# Altium PCB PJ1301-MAINPCB.PcbDoc (part 4 of 4)
Units mm, origin at the board's own origin, x right, y up, seen from the top; angles counter-clockwise.
Board outline 163.83 x 187.81 mm, 4 copper layers (Top Layer, GND, POWER, Bottom Layer); 435 components, 348 nets, 1618 pads, 913 vias.
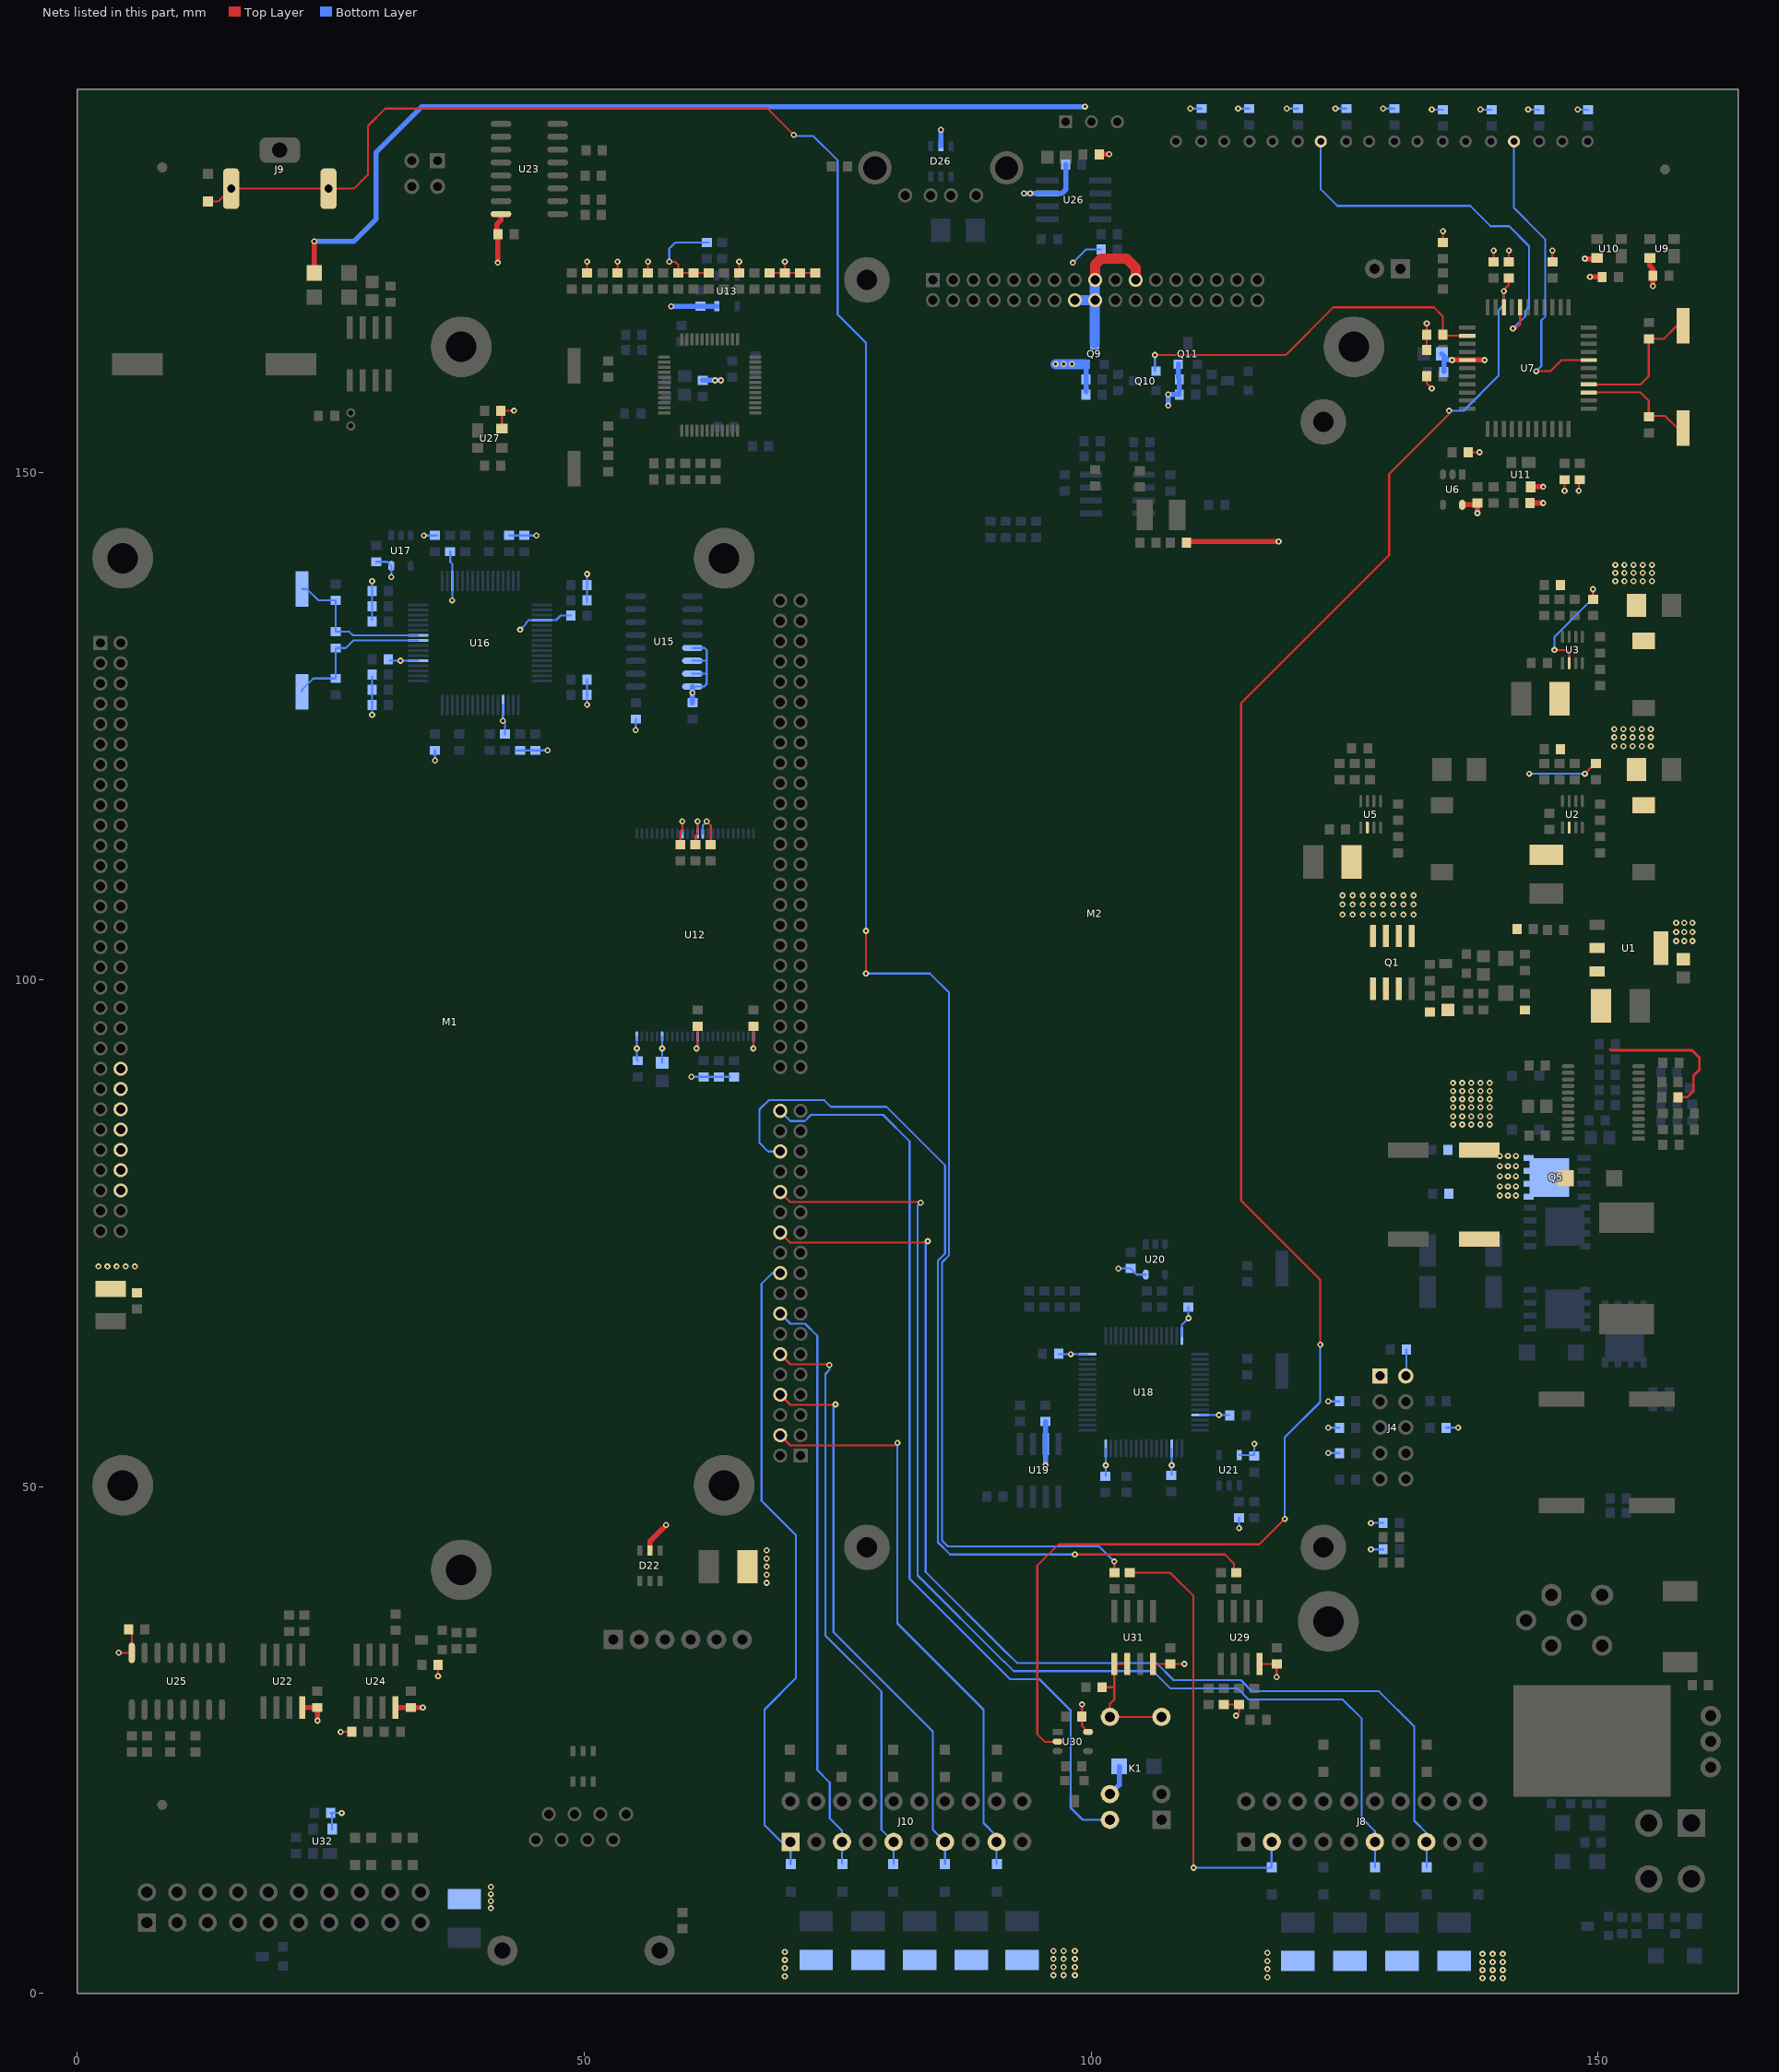
[diagram p6: the nets of this part, all layers, seen from the top]

## Via types
v1: diameter 0.6, hole 0.3, Top Layer to Bottom Layer, tented both sides, 912 vias
v2: diameter 0.6, hole 0.3, Top Layer to Bottom Layer, 1 vias

## Nets (pads, with @x,y where several pads share a name; then routed paths per layer and width w, separated by ;. In a path a pad name is that pad's centre, name@x,y a point inside that pad or via, vN(x,y) a via of type N, cw(c..) or ccw(c..) an arc to the next point about the centre after c; other vN are vias at no path point) (continued)
V3.3: C16.1 C57.2 C58.2 C59.2 C60.2 C61.2 C62.2 C63.2 C78.1 C79.1 C80.2 C81.2 C82.2 C83.2 C84.1 C87.1 C88.1 C89.1 C91.2 C92.2 C93.2 C94.2 C95.2 C96.2 C97.1 C101.1 C107.1 C112.2 C122.1 C123.2 C124.1 C125.1 J4.1 J4.2 L1.2 L5.2 Q9.2 Q11.2 R14.1 R53.2 R54.2 R55.2 R56.1 R63.2 R64.2 R67.1 R69.2 R70.2 R71.2 R72.2 R73.2 R74.2 R75.2 R76.2 R77.2 R78.2 R79.2 R80.2 R81.2 R82.2 R83.2 R84.2 R85.2 R86.2 R91.2 R92.2 R93.2 R95.2 R98.2 R101.1 R102.1 R110.2 R111.2 R112.2 R113.2 R119.1 R129.2 R130.2 R152.2 R153.2 R154.2 R155.2 R158.2 U12.1 U12.12 U12.19 U12.24 U12.34 U12.37 U12.38 U13.5 U15.13 U15.14 U15.15 U15.16 U16.4 U16.21 U16.35 U16.52 U17.5 U18.13 U18.19 U18.32 U18.48 U18.64 U20.5 U21.5 U23.16 U25.16 U27.4 U29.4 U30.5 U31.4 U32.4 | length 174.9
  Top Layer w0.2: v1(4.1,33.6) 4.112,33.588 U25.16@5.4,33.588 5.4,35.6 C107.1@5.1,35.9 ; U27.4@41.9,154.35 C112.2@41.9,156 ; C112.2@41.9,156.1 v1(43.1,156.1) ; R152.2@50.3,169.7 v1(50.3,170.8) ; R153.2@53.3,169.7 v1(53.3,170.8) ; R154.2@56.3,169.7 v1(56.3,170.8) ; v1@58.388,170.788 59.012,170.788 59.3,170.5 R155.2@59.3,169.7 R72.2@62.3,169.7 ; C58.2@59.5,113.3 59.5,114.6 59.7,114.8 v1(59.7,115.6) ; C59.2@61,113.3 61,114.2 61.2,114.4 v1(61.2,115.6) ; v1(61.1,93.2) 61.2,93.3 C62.2@61.2,95.4 ; v1(62.1,115.6) 62.5,115.2 C60.2@62.5,113.3 ; R71.2@65.3,169.7 v1(65.3,170.8) ; v1(66.7,93.2) C63.2@66.7,95.4 ; R70.2@68.3,169.7 R64.2@69.8,169.7 ; v1(69.8,170.8) R64.2@69.8,169.7 ; R63.2@72.8,169.7 R69.2@71.3,169.7 R64.2@69.8,169.7 ; v1(99.1,28.5) C123.2@99.1,27.3 99.1,26.4 U30.5@99.7,25.8 ; U31.4@106.105,32.5 v1(109.2,32.5) ; R130.2@113.1,28.5 R129.2@114.5,28.5 ; v1(114.3,27.4) 114.6,27.7 R129.2@114.6,28.5 ; U29.4@116.605,32.5 C122.1@118.3,32.5 v1(118.3,31.2)
  Top Layer w0.5: v1(41.5,170.7) C101.1@41.5,173.5 41.4,173.6 41.4,174.5 41.812,174.912 U23.16@41.812,175.5
  Bottom Layer w0.2: U32.4@25.15,16.2 25.15,17.65 C125.1@25,17.8 v1(26.1,17.8) ; v1(29.1,126.1) R80.2@29.1,128.6 R81.2@29.1,129.9 ; R85.2@29.1,135.5 R84.2@29.1,136.8 v1(29.1,139.3) ; C84.1@29.5,141.2 30.6,141.2 U17.5@31,140.8 v1(31,139.7) ; C80.2@30.85,131.45 U16.21@33.65,131.45 ; v1@34.4,143.8 R82.2@35.5,143.8 ; v1(35.3,121.6) R78.2@35.3,122.6 ; C83.2@36.8,142.2 36.8,141.2 37,141 U16.35@37,139.3 v1(37,137.4) ; U16.4@42,127.1 v1(42,125.5) 42.2,125.3 C81.2@42.2,124.2 ; R86.2@42.6,143.8 v1(45.3,143.8) ; R74.2@43.233,122.6 45.8,122.6 v1(46.4,122.6) ; v1(43.7,134.5) 44.3,135.1 44.3,135.2 44.55,135.45 U16.52@45.85,135.45 47.25,135.45 47.7,135.9 C82.2@48.7,135.9 ; v1(50.3,127.1) R77.2@50.3,129.6 ; R93.2@50.3,137.2 50.3,138.5 v1@50.3,139.8 ; v1(55.1,124.6) R73.2@55.1,125.7 ; U12.24@55.2,94.4 v1(55.2,93.2) 55.2,92.1 C61.2@55.3,92 ; C57.2@57.7,91.8 U12.19@57.7,94.4 ; v1(58.4,170.8) 58.4,172.1 59,172.7 R67.1@62.3,172.7 ; U12.34@59.7,114.4 v1(59.7,115.6) ; v1(60.6,90.4) R53.2@61.8,90.4 R55.2@64.4,90.4 ; U15.16@60.688,128.9 61.84,128.9 62.07,129.13 ; U15.15@60.688,130.17 62.07,130.17 62.1,130.2 ; U15.14@60.688,131.44 62.06,131.44 ; U15.13@60.688,132.71 60.698,132.7 61.9,132.7 62.1,132.5 62.1,130.2 ; v1(61.1,93.2) 61.2,93.3 U12.12@61.2,94.4 ; U12.37@61.2,114.4 v1(61.2,115.6) ; U12.38@61.7,114.4 61.7,115.2 v1(62.1,115.6) ; 62.1,129.16 62.1,130.2 ; v1(66.7,93.2) U12.1@66.7,94.4 ; C95.2@96.85,63.05 U18.48@99.65,63.05 ; v1(98.2,170.7) 99.5,172 R158.2@101,172 ; C94.2@101.45,51.05 U18.32@101.45,53.75 ; v1(102.7,71.5) C89.1@103.9,71.5 104.5,70.9 U20.5@105.4,70.9 ; C93.2@107.95,51.15 U18.19@107.95,53.75 ; U18.64@108.95,64.85 108.95,65.95 v1(109.6,66.6) C96.2@109.6,67.7 ; U18.13@110.75,57.05 C92.2@113.65,57.05 ; v1(114.6,45.9) R119.1@114.6,46.9 ; U21.5@114.6,53.1 116,53.1 116.1,53.2 v1(116.1,54.2) ; v1(123.4,53.3) R112.2@124.5,53.3 ; v1(123.4,55.8) R111.2@124.5,55.8 ; v1(123.4,58.4) R110.2@124.5,58.4 ; v1(127.6,43.8) R102.1@128.8,43.8 ; v1(127.6,46.4) R101.1@128.8,46.4 ; J4.2@131.1,60.96 C91.2@131.1,63.5 ; R113.2@135,55.8 v1(136.2,55.8)
  Bottom Layer w0.5: v1(58.6,166.4) C78.1@61.5,166.4 U13.5@63.1,166.4 ; U15.16@60.688,128.9 60.7,128.888 v1(60.7,128.3) C79.1@60.7,127.3 ; L5.2@61.7,159.1 v1(63.5,159.1) ; Q9.2@99.4,160.7 99.5,160.6 C87.1@99.5,158 ; v1(107.6,156.6) v1(107.6,157.7) C88.1@108.7,157.7 ; Q11.2@108.595,160.7 108.595,159.405 108.7,159.3 R98.2@108.7,159.2 C88.1@108.7,158
  Bottom Layer w1: v1(96.5,160.7) Q9.2@99.4,160.7
  other v1: 101.45,52.1 107.95,52.1 112.6,57.05 98,63.05 57.7,93.2 151.6,123 152.5,123 153.4,123 154.3,123 155.2,123 151.6,123.9 152.5,123.9 153.4,123.9 154.3,123.9 155.2,123.9 151.6,124.7 152.5,124.7 153.4,124.7 154.3,124.7 155.2,124.7 31.9,131.45 50.3,140 34.2,143.8 62.9,159.1 97.3,160.7 98.1,160.7
V3.3-MCU: C10.2 C44.1 C47.2 C48.2 C49.2 C50.2 C51.2 D27.2 R4.1 R39.1 R40.1 R41.1 R42.1 R43.1 R44.1 R45.1 R46.1 R47.1 R48.1 R49.1 R50.1 R51.1 R52.1 R97.2 R100.2 R106.1 R134.1 R139.1 U1.2 U1.4 U6.5 U7.38 U9.4 U10.4 U11.4 | length 127.2
  Top Layer w0.2: R139.1@133.1,159.5 133.1,158.8 v1(133.6,158.3) ; R100.2@133.1,162.2 R97.2@133.1,163.6 v1(133.1,164.7) ; R51.1@134.7,172.7 v1(134.7,173.8) ; R39.1@137.2,152 v1(138.3,152) ; R106.1@139.7,170.8 v1(139.7,171.9) ; R134.1@141.2,170.8 v1(141.2,171.9) ; R49.1@145.5,170.8 v1(145.5,171.9) ; v1(146.7,148.2) R50.1@146.7,149.3 ; v1(148.1,148.2) R4.1@148.1,149.3
  Top Layer w0.5: D27.2@23.4,169.5 v1(23.4,172.8) ; R52.1@100.7,181.4 v1(101.8,181.4) ; v1(135.6,161.1) U7.38@137.1,161.1 v1(138.8,161.1) ; v1(148.7,171.1) U10.4@149.85,171.1 ; v1(149.2,169.3) C50.2@150.4,169.3 ; U9.4@155.1,171.15 155.1,170.4 155.4,170.1 C48.2@155.4,169.4 v1(155.4,168.4)
  Top Layer w0.508: U6.5@136.6,146.827 C44.1@137.927,146.827 ; v1(138.1,146) C44.1@138.1,147 ; C51.2@143.3,147 v1(144.6,147) ; U11.4@143.35,148.6 v1(144.6,148.6)
  Bottom Layer w0.2: v1(109.8,185.9) R45.1@110.9,185.9 ; v1(114.5,185.9) R44.1@115.6,185.9 ; v1(119.3,185.9) R47.1@120.4,185.9 ; v1(124.1,185.9) R48.1@125.2,185.9 ; v1(128.8,185.9) R43.1@129.9,185.9 ; v1(133.6,185.8) R42.1@134.7,185.8 ; v1(138.4,185.8) R41.1@139.5,185.8 ; v1(143.1,185.8) R40.1@144.2,185.8 ; v1(148,185.8) R46.1@149,185.8
  Bottom Layer w0.5: v1(23.4,172.8) 27.3,172.8 29.5,175 29.5,181.6 34,186.1 v1(99.4,186.1) ; C49.2@134.6,161.7 C49.2@134.8,161.5 ; C47.2@134.8,160 C49.2@134.8,161.5 ; v1(135.6,161.1) 135.2,161.1 C49.2@134.8,161.5
  other v1: 157.7,103.8 158.5,103.8 159.3,103.8 157.7,104.7 158.5,104.7 159.3,104.7 157.7,105.6 158.5,105.6 159.3,105.6
V5: C26.1 C55.2 C56.2 C90.2 C100.2 C106.1 C113.1 D22.5 D26.5 D40.1 F2.2 K1.9 L2.2 M1.A44 M1.A46 M1.A48 M1.A50 M1.A52 M1.A54 M1.A56 R20.1 R123.1 R126.2 R140.2 U19.3 U22.8 U24.8 U26.7 | length 35.9
  Top Layer w0.2: v1(26,25.8) R126.2@27.1,25.8 ; v1(35.6,31.3) R123.1@35.6,32.4
  Top Layer w0.5: U22.8@22.205,28.2 C100.2@23.7,28.2 v1(23.7,26.9) ; U24.8@31.405,28.2 v1(34.1,28.2) ; D22.5@56.5,43.7 56.5,44.6 57.5,45.6 v1(58.1,46.2) ; R140.2@109.3,143.2 v1(118.5,143.2)
  Bottom Layer w0.5: D26.5@85.2,182.2 v1(85.2,183.8) ; v1(93.365,177.535) U26.7@95.7,177.535 97.135,177.535 97.5,177.9 C113.1@97.5,180.4 ; v1(95.5,52.1) C90.2@95.5,56.4 ; K1.9@101.86,19.66 102.771,20.571 D40.1@102.771,22.4
  other v1: 68,40.5 68,41.3 68,42.1 68,42.9 68,43.7 2.1,71.7 3,71.7 3.9,71.7 4.8,71.7 5.7,71.7 151.7,139.3 152.6,139.3 153.5,139.3 154.4,139.3 155.3,139.3 151.7,140.1 152.6,140.1 153.5,140.1 154.4,140.1 155.3,140.1 151.7,140.9 152.6,140.9 153.5,140.9 154.4,140.9 155.3,140.9 94,177.535
V12: C15.2 C25.2 C37.2 F3.1 F4.1 F5.1 F6.1 F7.1 F9.1 F10.1 F11.1 F12.1 F13.1 Q1.5 Q1.6 Q1.7 Q1.8 R2.2 R12.2 R18.2 U2.2 U3.2 U5.2 | length 18.1
  Top Layer w0.2: v1(145.7,132.5) 146.9,132.5 147.15,132.25 U3.2@147.15,131.2 ; v1@148.6,120.3 v1(148.7,120.3) R12.2@149.7,121.3 ; R18.2@149.5,137.5 v1(149.5,138.5)
  Bottom Layer w0.2: v2(143.2,120.3) v1@148.6,120.3 ; v1(145.7,132.5) 145.7,133.8 149.5,137.6 v1(149.5,138.5)
  other v1: 138.6,1.5 139.6,1.5 140.6,1.5 117.4,1.6 69.8,1.7 96.3,1.8 97.3,1.8 98.4,1.8 138.6,2.3 139.6,2.3 140.6,2.3 117.4,2.4 69.8,2.5 96.3,2.6 97.3,2.6 98.4,2.6 138.6,3.1 139.6,3.1 140.6,3.1 117.4,3.2 69.8,3.3 96.3,3.4 97.3,3.4 98.4,3.4 138.6,3.9 139.6,3.9 140.6,3.9 117.4,4 69.8,4.1 96.3,4.2 97.3,4.2 98.4,4.2 40.8,8.4 40.8,9.1 40.8,9.8 40.8,10.5 124.8,106.4 125.8,106.4 126.8,106.4 127.8,106.4 128.8,106.4 129.8,106.4 130.8,106.4 131.8,106.4 124.8,107.4 125.8,107.4 126.8,107.4 127.8,107.4 128.8,107.4 129.8,107.4 130.8,107.4 131.8,107.4 124.8,108.3 125.8,108.3 126.8,108.3 127.8,108.3 128.8,108.3 129.8,108.3 130.8,108.3 131.8,108.3
V12-MP: C2.2 C9.2 C19.1 C20.1 C22.2 C23.2 D9.2 Q1.1 Q1.2 Q1.3 Q5. Q5.5 Q5.6 Q5.7 Q5.8 R1.2 R26.1 R156.1 U1.3 | length 14.4
  Top Layer w0.254: 151.2,93.1 151.273,93.027 159.273,93.027 160,92.3 160,91.1 159.4,90.5 159.4,89 158.8,88.4 R26.1@157.9,88.4
  other v1: 140.3,78.7 141.1,78.7 141.9,78.7 140.3,79.6 141.1,79.6 141.9,79.6 140.3,80.6 141.1,80.6 141.9,80.6 140.3,81.6 141.1,81.6 141.9,81.6 140.3,82.6 141.1,82.6 141.9,82.6 135.7,85.7 136.6,85.7 137.5,85.7 138.4,85.7 139.3,85.7 135.7,86.5 136.6,86.5 137.5,86.5 138.4,86.5 139.3,86.5 135.7,87.4 136.6,87.4 137.5,87.4 138.4,87.4 139.3,87.4 135.7,88.2 136.6,88.2 137.5,88.2 138.4,88.2 139.3,88.2 135.7,89 136.6,89 137.5,89 138.4,89 139.3,89 135.7,89.8 136.6,89.8 137.5,89.8 138.4,89.8 139.3,89.8
VIDEO-OUT: K1.5 K1.6 R138.1 U31.1 U31.2 | length 12.9
  Top Layer w0.2: R138.1@101.1,30.2 102.295,30.2 ; U31.2@103.565,32.5 U31.1@102.295,32.5 102.295,30.2 ; K1.5@106.94,27.28 K1.6@101.86,27.28 101.86,28.56 102.295,28.995 102.295,30.2
VIDEO-SW: R134.2 U7.31 U30.2 | length 185.7
  Top Layer w0.2: U30.2@96.7,24.85 96.65,24.8 95.475,24.8 94.7,25.575 94.7,42.2 96.8,44.3 116.6,44.3 v1(119.1,46.8) ; v1(122.6,64) 122.6,70.4 114.8,78.2 114.8,127.269 129.4,141.869 129.4,149.869 135.3,155.769 v1(135.3,156.1) ; U7.31@140.7,166.3 140.7,168 141.2,168.5 R134.2@141.2,169.2
  Bottom Layer w0.2: v1(119.1,46.8) 119.1,54.834 122.6,58.334 v1(122.6,64) ; v1(135.3,156.1) 136.731,156.1 140.2,159.569 140.2,166 140.7,166.5 v1(140.7,167.9)
VIN1: M1.C32 R132.2 | length 95.5
  Top Layer w0.2: v1(98.4,43.3) 113.2,43.3 114.1,42.4 R132.2@114.1,41.5
  Bottom Layer w0.2: M1.C32@69.352,83.049 68.151,83.049 67.3,83.9 67.3,87.2 68.2,88.1 73.683,88.1 74.334,87.449 79.817,87.449 85.6,81.666 85.6,72.969 84.9,72.269 84.9,44.5 86.1,43.3 v1(98.4,43.3)
VIN2: D37.2 J8.11 M1.C28 | length 116
  Top Layer w0.2: M1.C28@69.352,79.049 70.352,78.049 83.151,78.049 v1(83.2,78)
  Bottom Layer w0.2: v1(83.2,78) 82.9,77.7 82.9,41.234 91.434,32.7 91.466,32.7 92.366,31.8 106.103,31.8 107.803,30.1 114.437,30.1 115.537,29 124.8,29 126.7,27.1 126.7,17.3 127.987,16.013 J8.11@127.987,14.951 ; D37.2@128,12.45 J8.11@128,14.939
VIN3: D38.2 J8.15 M1.C24 | length 116.6
  Top Layer w0.2: M1.C24@69.352,75.049 70.352,74.049 83.749,74.049 v1(83.9,74.2)
  Bottom Layer w0.2: v1(83.9,74.2) 83.7,74 83.7,41.569 91.769,33.5 91.797,33.5 92.697,32.6 106.434,32.6 108.134,30.9 114.769,30.9 115.869,29.8 128.4,29.8 131.867,26.333 131.867,17.033 133.067,15.833 J8.15@133.067,14.951 ; D38.2@133.1,12.45 J8.15@133.1,14.919
VIN4: D39.2 J10.1 M1.C20 | length 63.8
  Bottom Layer w0.2: M1.C20@69.352,71.049 68.549,71.049 67.5,70 67.5,48.6 70.9,45.2 70.9,31.1 67.8,28 67.8,16.6 69.449,14.951 J10.1@70.361,14.951 D39.2@70.361,12.789
VIN5: D46.2 J10.5 M1.C16 | length 57.6
  Bottom Layer w0.2: M1.C16@69.352,67.049 70.352,66.049 71.8,66.049 73,64.849 73,22.041 74.241,20.8 74.241,17.259 75.441,16.059 J10.5@75.441,14.951 D46.2@75.441,12.809
VIN6: D47.2 J10.9 M1.C12 | length 57.5
  Top Layer w0.2: M1.C12@69.352,63.049 70.352,62.049 74.151,62.049 v1(74.2,62)
  Bottom Layer w0.2: v1(74.2,62) 74.2,61.5 73.8,61.1 73.8,35.3 79.321,29.779 79.321,16.151 J10.9@80.521,14.951 D47.2@80.521,12.771
VIN7: D48.2 J10.13 M1.C8 | length 55.9
  Top Layer w0.2: M1.C8@69.352,59.049 70.352,58.049 74.749,58.049 v1(74.8,58.1)
  Bottom Layer w0.2: v1(74.8,58.1) 74.6,57.9 74.6,35.631 84.4,25.831 84.4,16.152 J10.13@85.601,14.951 D48.2@85.601,12.751
VIN8: D49.2 J10.17 M1.C4 | length 57.6
  Top Layer w0.2: M1.C4@69.352,55.049 70.352,54.049 80.649,54.049 v1(80.9,54.3)
  Bottom Layer w0.2: v1(80.9,54.3) 80.9,36.5 89.4,28 89.4,16.8 90.681,15.519 J10.17@90.681,14.951 D49.2@90.681,12.769
VLOSS-LED: D21.2 U7.29 | length 39
  Top Layer w0.2: v1(141.6,164.2) 141.9,164.2 142.3,164.6 U7.29@142.3,166.3
  Bottom Layer w0.2: D21.2@122.653,182.661 122.653,177.947 124.3,176.3 137.403,176.3 139.403,174.3 141.237,174.3 143.2,172.337 143.2,166.331 142.8,165.931 142.8,165.4 v1(141.6,164.2)
VO1: D35.2 J8.3 R137.2 | length 44.4
  Top Layer w0.2: R137.2@103.6,41.5 107.8,41.5 110.1,39.2 v1(110.1,12.4)
  Bottom Layer w0.2: v1(110.1,12.4) 117.75,12.4 D35.2@117.8,12.45 J8.3@117.8,14.924
VO2: D45.2 J9.1 R136.2 | length 234.4
  Top Layer w0.2: D45.2@12.9,176.75 13.95,176.75 J9.1@15.2,178 J9.1@24.8,178 27.3,178 28.7,179.4 28.7,184.2 30.4,185.9 68.1,185.9 v1(70.7,183.3) ; v1(77.8,100.6) v1(77.8,104.8) ; R136.2@102.3,41.5 v1(102.3,42.6)
  Bottom Layer w0.2: v1(70.7,183.3) 70.8,183.2 72.6,183.2 75,180.8 75,165.6 77.8,162.8 v1(77.8,104.8) ; v1(77.8,100.6) 84.1,100.6 86,98.7 86,72.803 85.3,72.103 85.3,44.666 85.866,44.1 100.8,44.1 v1(102.3,42.6)
VOUT: K1.10 M1.C36 | length 92.9
  Bottom Layer w0.2: M1.C36@69.352,87.049 70.352,86.049 71.766,86.049 72.352,86.635 72.352,86.649 79.485,86.649 82.1,84.034 82.1,40.903 92.003,31 94.9,31 98,27.9 98,18.3 99.18,17.12 K1.10@101.86,17.12
WIFI-LED: D13.2 U7.18 | length 30
  Top Layer w0.2: v1(143.9,160) 145.3,160 146.4,161.1 U7.18@149.1,161.1
  Bottom Layer w0.2: D13.2@141.704,182.661 141.704,176.097 144.5,173.3 144.8,173 144.8,165.4 144.4,165 144.4,160.5 v1(143.9,160)
WIFI-PWR: M2.16 M2.17 M2.18 M2.21 Q9.3 | length 15.5
  Top Layer w1: M2.17@100.4,169 100.4,170.5 101,171.1 103.5,171.1 104.4,170.2 M2.21@104.4,169
  Bottom Layer w1: M2.16@98.4,167 M2.18@100.34,167 ; Q9.3@100.34,162.732 M2.18@100.34,167 ; M2.17@100.34,168.94 M2.18@100.34,167 ; M2.18@100.4,167 M2.18@100.34,167
WIFI-PWR-CTRL: Q10.2 R97.1 U7.35 | length 36.6
  Top Layer w0.2: v1(106.3,161.6) 119.2,161.6 123.9,166.3 133.8,166.3 134.7,165.4 R97.1@134.7,163.4 ; R97.1@134.8,163.5 U7.35@137.1,163.5
  Bottom Layer w0.2: Q10.2@106.3,160 v1(106.3,161.6)
X1: C52.2 U7.15 Y1.2 | length 13.9
  Top Layer w0.2: U7.15@149.1,158.7 154.2,158.7 155,159.5 C52.2@155,163.2 156.5,163.2 157.8,164.5 Y1.2@158.4,164.5
X2: C54.2 U7.14 Y1.1 | length 11.8
  Top Layer w0.2: U7.14@149.1,157.9 154.2,157.9 155,157.1 C54.2@155,155.5 155.1,155.6 156.6,155.6 157.821,154.379 Y1.1@158.4,154.379
XT1: C85.2 R94.2 U16.25 Y3.2 | length 15.4
  Bottom Layer w0.2: Y3.2@22.2,128.4 22.2,128.6 23.3,129.7 C85.2@25.5,129.7 R94.2@25.5,132.7 26.5,132.7 27.25,133.45 U16.25@33.65,133.45
XT2: C86.2 R94.1 U16.26 Y3.1 | length 15.2
  Bottom Layer w0.2: Y3.1@22.2,138.521 22.679,138.521 23.8,137.4 C86.2@25.5,137.4 R94.1@25.5,134.3 26.85,134.3 27.2,133.95 U16.26@33.65,133.95
pads on no net: D22.4 D22.6 D26.4 D26.6 D29.2 D29.5 J4.8 J7.4 J7.5 J7.7 J7.8 M1.A3 M1.A4 M1.A5 M1.A6 M1.A7 M1.A8 M1.A9 M1.A10 M1.A19 M1.A22 M1.A25 M1.A27 M1.A28 M1.A29 M1.A30 M1.A40 M1.A42 M1.B4 M1.B5 M1.B6 M1.B7 M1.B8 M1.B9 M1.B10 M1.B11 M1.B12 M1.B18 M1.B23 M2.24 TP17. TP18. TP19. TP20. TP21. TP22. U4.1 U6.1 U7.1 U7.2 U7.3 U7.5 U7.6 U7.7 U7.17 U7.28 U7.39 U7.41 U7.43 U7.44 U12.3 U12.4 U12.5 U12.6 U12.10 U12.11 U12.14 U12.15 U12.20 U12.21 U12.22 U12.26 U12.27 U12.28 U12.33 U12.35 U12.39 U12.40 U12.45 U12.46 U12.47 U14.25 U14.26 U15.9 U15.10 U15.11 U15.12 U16.3 U16.5 U16.13 U16.15 U16.34 U16.36 U16.44 U16.46 U17.1 U18.1 U18.2 U18.3 U18.4 U18.8 U18.9 U18.10 U18.11 U18.14 U18.15 U18.20 U18.21 U18.24 U18.25 U18.26 U18.27 U18.29 U18.30 U18.33 U18.34 U18.35 U18.36 U18.37 U18.38 U18.39 U18.40 U18.41 U18.51 U18.52 U18.53 U18.54 U18.57 U18.58 U18.59 U18.61 U18.62 U19.5 U20.1 U23.7 U23.8 U23.9 U23.10 U26.2 U26.3 U26.8 U28.3 U28.7 U29.3 U29.6 U30.1 U31.3 U31.6

## Polygon pours and split planes (outlines as drawn)
GND on Bottom Layer "Top Layer-No Net" (solid, remove dead copper, pour order 56): 163.83,0 163.83,187.808 0,187.808 0,0
V12-MP on Bottom Layer "Bottom Layer-GND" (solid, pour order 71): 134.8,83.2 134.8,90.308 134.9,90.4 139.9,90.4 140,90.308 140,83.385 140.1,83.292 140.1,83.2
V12-MP on Bottom Layer "Bottom Layer-GND" (solid, pour order 69): 147.3,78.3 147.3,80.7 147.3,83.3 146.3,83.3 137.7,83.3 134.9,83.3 134.8,83.2 134.8,82.2 134.8,78.3 134.9,78.3
NetD11_1 on Bottom Layer "Bottom Layer-GND" (solid, pour order 68): 144,65 144,76.8 143.27,76.8 138.413,76.8 138.3,76.7 138.3,65.1 138.413,65
NetC27_1 on Bottom Layer "Bottom Layer-GND" (solid, pour order 61): 145.4,77.9 144.7,77.9 144.6,77.8 144.6,76.7 144.6,72.2 156,72.2 156,73.1 156,81.9 156,82.7 155.9,82.8 147.9,82.8 147.9,81.1 147.9,79.4 151,79.4 151.1,79.3 151.1,78.4 151.1,78 151,77.9
NetC40_1 on Bottom Layer "Bottom Layer-GND" (solid, pour order 58): 153.7,71.6 154.8,71.6 155.9,71.6 156,71.6 156,70.3 156,69 155.9,68.9 153.5,68.9
NetC40_1 on Bottom Layer "Bottom Layer-GND" (solid, pour order 55): 149.8,61.6 149.6,61.4 148.5,61.4 144.7,61.4 144.6,61.4 144.6,63 144.6,70.5 144.6,71.6 144.7,71.6 147.3,71.6 153.7,71.6 153.8,71.6 153.8,66.85 152.05,66.85 150.05,66.85 149.8,66.85 149.8,63.8
PWR-IN on Bottom Layer "Bottom Layer-GND" (solid, pour order 53): 150.2,66.3 151.8,66.3 155.8,66.3 155.9,66.2 155.9,63.7 155.9,61.7 155.9,49.7 155.8,49.6 151.9,49.6 151.9,46.6 151.8,46.5 148.4,46.5 142.5,46.5 142.4,46.6 142.4,52.5 142.4,61 142.5,61 149.1,61 149.9,61 150.2,61.3
NetD54_2 on Bottom Layer "Bottom Layer-GND" (solid, remove dead copper, pour order 43): 153.002,13.5 156.882,13.5 157.188,13.5 157.291,13.6 157.291,15 157.291,18.3 157.393,18.4 158.107,18.4 162.498,18.4 162.6,18.5 162.6,29.3 162.6,29.4 162.498,29.5 153.002,29.5 152.9,29.4 152.9,27.8 152.9,13.6 153.002,13.5
NetC114_1 on Bottom Layer "Bottom Layer-GND" (solid, pour order 65): 87.7,178.5 90.4,178.5 90.5,178.4 90.5,176.7 90.5,176.6 91.6,175.5 94.2,175.5 97,175.5 97.1,175.4 97.1,174.6 97,174.5 96,174.5 95.9,174.4 95.8,174.3 95.8,174 95.8,172 95.7,171.9 92.8,171.9 87.9,171.9 87.2,171.9 87.1,172 87.1,174 87.1,175.5 87.1,175.7 87.6,176.2 87.6,178.4
V12 on Bottom Layer "Bottom Layer-GND" (solid, pour order 57): 36.1,10.8 36.3,11 40,11 40.7,11 41.3,11 41.5,10.8 41.5,8 41.3,7.8 37.2,7.8 36.8,7.8 36.3,7.8 36.1,8
V12 on Bottom Layer "Bottom Layer-GND" (solid, pour order 64): 71.134,1.2 76.682,1.2 99.087,1.2 99.3,1.367 99.3,4.533 99.087,4.7 69.213,4.7 69,4.533 69,3.617 69,1.367 69.213,1.2
V12 on Bottom Layer "Bottom Layer-GND" (solid, pour order 63): 118.346,1.1 122.887,1.1 141.225,1.1 141.4,1.262 141.4,4.338 141.225,4.5 116.775,4.5 116.6,4.338 116.6,3.448 116.6,1.262 116.775,1.1
AGND on Bottom Layer "Bottom Layer-GND" (solid, remove dead copper, pour order 84): 89.2,154 88.9,153.7 88.9,141.7 89.2,141.4 111.9,141.4 112.2,141.7 112.2,153.7 111.9,154 89.2,154
GND on Top Layer "Top Layer-No Net" (solid, remove dead copper, pour order 54): 163.83,0 163.83,187.808 0,187.808 0,0
GND on Top Layer "Top Layer-No Net" (solid, remove dead copper, pour order 51): 144,109.5 146.7,109.5 147.2,109 147.7,108.5 148.1,108.5 150.7,108.5 150.9,108.3 150.9,104.7 150.7,104.5 148.4,104.5 147.9,104 147,103.1 146.2,103.1 145.9,103.4 145.9,104.7 145.9,105.4 145.9,105.6 145.9,105.8 145.8,105.9 144.2,105.9 143.5,105.9 143.2,106.2 143.2,109.5
GND on Top Layer "Top Layer-No Net" (solid, remove dead copper, pour order 48): 149.9,33 152.9,33 154,33 154.3,33.3 154.4,33.4 154.4,34.4 154.4,36.1 155.2,36.9 155.4,37.1 155.4,38.3 155.4,43.6 155.9,44.1 160.9,44.1 162.9,44.1 163.3,44.5 163.3,46 163.3,60.5 162.9,60.9 152.4,60.9 151.6,60.1 151.6,40.9 151.1,40.4 150.1,40.4 149.9,40.4 148.9,39.4 146.7,37.2 146.7,37.1 146.7,36.4 147.3,35.8 148,35.1 148,34.7 148,33.5 148.5,33
V12-MP on Top Layer "Bottom Layer-GND" (solid, remove dead copper, pour order 52): 127,101.3 130.7,101.3 130.9,101.1 130.9,97.7 130.9,97.5 131.1,97.3 136,97.3 136.3,97 136.3,95.6 136.6,95.3 139.5,95.3 139.8,95.6 139.8,97 140.1,97.3 143.7,97.3 144,97.6 144,101.5 144.3,101.8 151.7,101.8 152.1,101.4 152.1,100.1 152.1,93.2 151.8,92.9 147.2,92.9 141.4,92.9 141.1,92.6 141.1,90.2 126.8,90.2 126.5,90.5 126.5,101 126.8,101.3
V12-MP on Top Layer "Bottom Layer-GND" (solid, remove dead copper, pour order 44): 147.6,81.2 147.6,83.2 147.5,83.3 146.7,83.3 141.2,83.3 141.1,83.4 141.1,90.2 141,90.3 134.9,90.3 134.8,90.2 134.8,78.8 134.8,71.7 135,71.5 141.2,71.5 141.4,71.7 141.4,77.9 141.6,78.1 147.5,78.1 147.6,78.2
NetC1_1 on Top Layer "Bottom Layer-GND" (solid, pour order 76): 156.4,38.4 160,38.4 160.2,38.6 160.2,40.4 160.2,43.3 160,43.5 156.2,43.5 156,43.3 156,40 156,38.6 156.2,38.4
V12 on Top Layer "Bottom Layer-GND" (solid, pour order 75): 137.6,114 137.6,116.5 137.7,116.6 139,116.6 140.3,116.6 140.4,116.7 140.4,117.3 140.4,118.2 140.4,125 140.4,125.4 140.5,125.5 142.9,125.5 144.2,125.5 144.3,125.6 144.3,130 144.4,130.1 146.8,130.1 146.9,130.2 146.9,131.9 147,132 147.3,132 147.4,131.9 147.4,130.2 147.4,123.9 147.2,123.7 146.5,123.7 144.2,123.7 143.9,123.4 143.9,118.5 143.9,113.9 142.5,113.9 137.7,113.9
NetC14_1 on Top Layer "Bottom Layer-GND" (solid, pour order 74): 147.7,115.8 147.9,115.8 148,115.8 148.1,115.7 148.1,114.5 148.1,114.1 148.9,113.3 157,113.3 157.2,113.3 157.3,113.2 157.3,109.1 157.2,109 147.7,109 147.6,109.1 147.6,115.7 147.7,115.8
V12 on Top Layer "Bottom Layer-GND" (solid, pour order 73): 127.1,115.8 127.4,115.8 127.5,115.7 127.5,113.7 127.5,112.1 127.5,112 127.5,109.2 127.7,109 128,109 137.4,109 137.6,109.2 137.6,114 146.8,114 146.9,114.1 146.9,115.7 147,115.8 147.3,115.8 147.4,115.7 147.4,114.3 147.4,110.1 147.3,110 144.6,110 142.8,110 142.7,109.9 142.7,107.2 142.6,107.1 142.3,107.1 142.1,107.1 137.7,107.1 136.1,107.1 133.9,104.9 133.9,104.1 133.9,103.2 133.7,103 132.2,103 123.8,103 123.7,103.1 123.7,105.2 123.7,109.3 123.7,113.7 123.8,113.8 126.9,113.8 127,113.9 127,115.7
NetC36_1 on Top Layer "Bottom Layer-GND" (solid, pour order 72): 127.8,115.8 128,115.8 128.1,115.7 128.1,113.7 128.6,113.2 130.2,113.2 136.8,113.2 137,113 137,109.8 136.7,109.5 133.6,109.5 130.7,109.5 127.9,109.5 127.7,109.7 127.7,113.5 127.7,115.7
NetC27_1 on Top Layer "Bottom Layer-GND" (solid, pour order 67): 150.75,82 150.85,82.1 153.75,82.1 153.85,82 153.85,79.4 153.85,78.8 153.75,78.7 150.85,78.7 150.75,78.8
NetC27_1 on Top Layer "Bottom Layer-GND" (solid, pour order 62): 149.259,78.4 155.724,78.4 156.241,78.4 156.371,78.4 156.5,78.295 156.5,76.932 156.5,72.1 156.405,72.1 154.1,72.1 149.095,72.1 149,72.1 149,76.198 149,78.295 149.129,78.4
NetC40_1 on Top Layer "Bottom Layer-GND" (solid, pour order 59): 154.819,64.2 156.371,64.2 156.5,64.309 156.5,64.526 156.5,71.409 156.409,71.5 155.7,71.5 152.4,71.5 149.091,71.5 149,71.409 149,64.309 149.129,64.2
PWR-IN on Top Layer "Bottom Layer-GND" (solid, pour order 49): 144.8,38 146.4,38 146.9,38.5 147.15,38.75 149.4,41 150.5,41 151,41.5 151,43 151,59.6 150.8,59.8 142.6,59.8 142.4,59.6 142.4,39.484 143.884,38
NetC1_2 on Top Layer "Bottom Layer-GND" (solid, pour order 47): 143.4,35 140.9,35 140.8,34.9 140.8,34.1 140.9,34 143.4,34
NetC1_2 on Top Layer "Bottom Layer-GND" (solid, remove dead copper, pour order 45): 144.483,36 146.474,36 147.469,35 147.469,32.6 147.569,32.5 147.967,32.5 154.835,32.5 154.935,32.6 154.935,34.4 154.935,35.9 155.034,36 159.513,36 159.812,36 159.912,35.9 159.912,35.5 159.912,26.4 160.212,26.1 161.9,26.1 162.4,26.1 162.4,26.2 162.4,25.3 162.4,23.6 161.2,23.6 160.211,23.6 159.912,23.3 159.912,23 159.912,19.1 159.812,19 158.219,19 140.9,19 140.8,19.1 140.8,21.3 140.8,34.4 140.8,34.5 140.9,34.6 143.288,34.6 143.388,34.7 143.388,35
NetJ6_5 on Top Layer "Bottom Layer-GND" (solid, pour order 66): 75.5,182.067 75.5,182.333 75.601,182.4 75.904,182.4 93.599,182.4 93.7,182.333 93.7,178.267 93.599,178.2 90.262,178.2 89.453,178.733 80.657,178.733 79.848,178.2 75.601,178.2 75.5,178.267
V5 on Top Layer "Bottom Layer-GND" (solid, pour order 46): 1.1,68.6 1.1,72.4 1.3,72.6 5.2,72.6 6.7,72.6 6.9,72.4 6.9,68.7 6.7,68.5 6.6,68.4 1.3,68.4
V5 on Top Layer "Bottom Layer-GND" (solid, pour order 50): 65,44.3 68.6,44.3 68.8,44.1 68.8,41.3 68.8,40.1 68.6,39.9 64.9,39.9 64.7,40.1 64.7,44.1 64.9,44.3
NetJ7_9 on Top Layer "Bottom Layer-GND" (solid, pour order 60): 40.5,1.5 49,1.5 59.5,1.5 60.7,1.5 60.9,1.7 60.9,4.4 60.9,4.9 60.9,7 60.7,7.2 39.5,7.2 39.3,7 39.3,1.7 39.5,1.5
NetC24_1 on Top Layer "Bottom Layer-GND" (solid, pour order 70): 147.6,131.9 148,131.9 148.1,131.8 148.1,130.5 148.1,129.8 148.2,129.7 155.3,129.7 157.1,129.7 157.4,129.4 157.4,125.8 157.1,125.5 151.9,125.5 147.9,125.5 147.6,125.8
V3.3-MCU on Top Layer "Bottom Layer-GND" (solid, remove dead copper, pour order 77): 149.2,102.3 151.9,102.3 152.2,102 152.5,101.7 152.5,101.4 152.5,101.3 152.7,101.1 159.6,101.1 159.9,101.4 159.9,105.2 159.9,106.3 159.6,106.6 156.7,106.6 152.9,106.6 152.7,106.6 152,105.9 152,104.4 152,104.3 151.7,104 148.8,104 148.7,103.9 148.7,102.4 148.8,102.3
V12 on Top Layer "Bottom Layer-GND" (solid, pour order 78): 142.7,107.2 142.7,104.7 142.4,104.4 139.4,104.4 135.3,104.4 135,104.1 135,103.3 134.7,103 133.4,103 133.4,107.2
CELLULAR-PWR on Top Layer "Bottom Layer-GND" (solid, remove dead copper, pour order 79): 131.5,114.7 136.8,114.7 137,114.9 137,117.9 136.4,118.5 136.4,123.3 136.4,123.6 126.9,123.6 126.6,123.3 126.6,122.5 126.9,122.2 128.9,122.2 129.2,121.9 129.2,118.4 129.4,118.2 130.9,118.2 131.3,117.8 131.3,114.9
V3.3 on Top Layer "Bottom Layer-GND" (solid, remove dead copper, pour order 80): 152.8,115 157.1,115 157.3,115.2 157.3,118.8 157,119.1 156.2,119.1 155.9,119.4 155.9,122 155.9,124.8 155.6,125.1 148,125.1 147.7,124.8 147.7,123.6 147.4,123.3 145.7,123.3 145.5,123.1 145.5,122.4 145.5,122.3 145.7,122.1 147.2,122.1 150.4,122.1 150.7,121.8 150.7,118.6 151.2,118.1 151.2,117.4 151.2,115.2 151.4,115
V5 on Top Layer "Bottom Layer-GND" (solid, remove dead copper, pour order 81): 153.5,130.8 157.1,130.8 157.4,131.1 157.4,133.8 156,135.2 156,141.4 155.7,141.7 146,141.7 145.7,141.4 145.7,138.5 145.9,138.3 150.1,138.3 150.4,138 150.4,135.1 150.7,134.8 151.1,134.4 151.1,133.6 151.1,131.1 151.4,130.8
CELLULAR-PWR on Top Layer "Bottom Layer-GND" (solid, remove dead copper, pour order 82): 126.6,123.3 126.6,127.7 126.6,128.6 126.9,128.9 136.4,128.9 136.4,123.3
AGND on Top Layer "Bottom Layer-GND" (solid, remove dead copper, pour order 83): 89.5,141.4 90.8,141.4 111.9,141.4 112.2,141.7 112.2,143 112.2,144.6 112.2,153.7 111.9,154 89.2,154 88.9,153.7 88.9,141.7 89.2,141.4
AGND on GND (split plane): 120.571,148.129 112.4,148.129 112.35,148.12 112.308,148.092 112.28,148.05 112.271,148 112.271,141.629 89.529,141.629 89.529,153.871 117.9,153.871 117.95,153.88 117.992,153.908 118.02,153.95 118.029,154 118.029,171 118.02,171.05 117.992,171.092 117.95,171.12 117.9,171.129 99.5,171.129 99.45,171.12 99.408,171.092 99.38,171.05 99.371,171 99.371,165.129 95.429,165.129 95.429,174.871 120.571,174.871
NetC1_1 on GND (split plane): 163.32,29.852 157.5,29.852 157.431,29.845 157.365,29.825 157.305,29.792 157.251,29.749 157.208,29.695 157.175,29.635 157.155,29.569 157.148,29.5 157.148,14 157.148,8.252 148.952,8.252 148.952,35.648 153.5,35.648 153.569,35.655 153.635,35.675 153.695,35.708 153.749,35.751 153.792,35.805 153.825,35.865 153.845,35.931 153.852,36 153.852,43.748 163.32,43.748
GND on GND (split plane): 52.838,57.754 14.98,57.754 14.98,119.106 52.838,119.106
GND on GND (split plane): 186 vertices, not listed, extent 0.51,0.51 163.32,187.297
V3.3-MCU on POWER (split plane): 163.32,94.852 147.852,94.852 147.852,108.848 159.5,108.848 159.569,108.855 159.635,108.875 159.695,108.908 159.749,108.951 159.792,109.005 159.825,109.065 159.845,109.131 159.852,109.2 159.852,145.5 159.845,145.569 159.825,145.635 159.792,145.695 159.749,145.749 159.695,145.792 159.635,145.825 159.569,145.845 159.5,145.852 132.852,145.852 132.852,181 132.845,181.069 132.825,181.135 132.792,181.195 132.749,181.249 132.695,181.292 132.635,181.325 132.569,181.345 132.5,181.352 98.352,181.352 98.352,187.297 163.32,187.297
CELLULAR-PWR on POWER (split plane): 87.248,129 87.256,128.935 87.282,128.874 87.322,128.822 87.374,128.782 87.435,128.756 87.5,128.748 135.248,128.748 135.248,123.752 81.752,123.752 81.752,171.248 87.248,171.248
V12 on POWER (split plane): 281 vertices, not listed, extent 35.852,0.51 163.32,108.848
V5 on POWER (split plane): 97.648,181 97.655,180.931 97.675,180.865 97.708,180.805 97.751,180.751 97.805,180.708 97.865,180.675 97.931,180.655 98,180.648 132.148,180.648 132.148,145.5 132.155,145.431 132.175,145.365 132.208,145.305 132.251,145.251 132.305,145.208 132.365,145.175 132.431,145.155 132.5,145.148 159.148,145.148 159.148,131.752 144.704,131.752 137.578,138.878 137.526,138.918 137.465,138.944 137.4,138.952 110.252,138.952 110.252,171.5 110.244,171.565 110.218,171.626 110.178,171.678 110.126,171.718 110.065,171.744 110,171.752 13.229,171.752 13.165,171.744 13.1,171.752 13.035,171.744 12.974,171.718 12.922,171.678 12.882,171.626 12.856,171.565 12.848,171.5 12.848,50 12.856,49.935 12.882,49.874 12.922,49.822 12.974,49.782 13.035,49.756 13.1,49.748 87.6,49.748 87.665,49.756 87.726,49.782 87.778,49.822 87.818,49.874 87.844,49.935 87.852,50 87.852,57.048 97.448,57.048 97.448,50.165 97.421,50.115 97.404,50.059 97.399,50 97.404,49.941 97.421,49.885 97.449,49.833 97.487,49.787 97.533,49.749 97.585,49.721 97.641,49.704 97.7,49.699 107.548,49.699 107.548,18.752 100.752,18.752 100.752,46.5 100.744,46.565 100.718,46.626 100.678,46.678 100.626,46.718 100.565,46.744 100.5,46.752 69.5,46.752 69.435,46.744 69.374,46.718 69.322,46.678 69.282,46.626 69.256,46.565 69.248,46.5 69.248,38.252 41.5,38.252 41.435,38.244 41.374,38.218 41.322,38.178 41.282,38.126 41.256,38.065 41.248,38 41.248,25.252 21.252,25.252 21.252,39.5 21.244,39.565 21.218,39.626 21.178,39.678 21.126,39.718 21.065,39.744 21,39.752 0.51,39.752 0.51,187.297 97.648,187.297
V3.3 on POWER (split plane): 52.838,57.754 14.98,57.754 14.98,119.106 52.838,119.106
V3.3 on POWER (split plane): 340 vertices, not listed, extent 0.51,0.51 159.148,171.248

## Keep-outs
Keep-Out Layer:
  lines w0.127: 0,1.016 ccw(c1.016,1.016) 1.016,0 162.814,0 ccw(c162.814,1.016) 163.83,1.016 163.83,186.792 ccw(c162.814,186.792) 162.814,187.808 1.016,187.808 ccw(c1.016,186.792) 0,186.792 0,1.016 ; 14.478,57.252 53.34,57.252 53.34,119.609 14.478,119.609 14.478,57.252

## Other copper
Top Layer:
  rectangle net GND: 64.5,154.6 64.8,155.5
  rectangle net GND: 64.5,154.95 65.5,155.2
  rectangle net GND: 66.3,161.4 67.5,161.8
  pour cut-out: 154.4,33 154.4,35.7 155.6,36.9 155.6,43.3 156.1,43.8 163.1,43.8 163.5,44.2 163.5,61.1 151.3,61.1 151.3,41.3 150.7,40.7 149.7,40.7 146.4,37.4 146.4,36.4 147.8,35 147.8,33
  pour cut-out: 141.5,92.4 141.691,92.4 159.5,92.4 159.5,82.2 159.3,82 148,82 148,83.4 148.1,83.5 148,83.6 141.5,83.6
  pour cut-out: 144.3,130 144.6,130 144.6,130.3 146.7,130.3 146.7,132.1 148.3,132.1 148.3,130 151.1,130 151.1,134.4 150.4,135.1 150.4,138 145.4,138 145.35,137.95 145.35,133.45 144.3,132.4
  pour cut-out: 156,138 156,135.1 158,133.1 158,132.9 158,134.3 156.6,135.7 156.6,138
  pour cut-out: 125.1,122.1 128.6,122.1 129,121.7 129,118.4 129.4,118 130.8,118 131.1,117.7 131.1,113.5 128.6,113.5 128.3,113.8 128.3,115.9 124.6,115.9 124.6,114.3 124,114.3 124,116.7 125.1,116.7
  pour cut-out: 129.5,110.4 152,110.4 152,93.4 129.5,93.4
  pour cut-out: 159.9,87.7 161.1,87.7 162,86.8 163.83,86.8 163.83,86.3 161.9,86.3 161,87.2 159.9,87.2
  pour cut-out: 157.4,133.8 158,133.2 158,125.5 157.3,124.8 156.6,124.8 156.6,120 157.9,120 157.9,107.2 160.5,107.2 160.5,100.2 160.2,100.2 153,100.2 153,93.9 159.8,93.9 160.8,92.9 160.8,90.7 159.9,89.8 159.9,87.4 159.5,87.4 159.5,90.3 160.2,91 160.2,92.5 159.5,93.2 152.1,93.2 152.1,101.1 152.6,101.1 159.9,101.1 159.9,106.3 159.6,106.6 157.3,106.6 157,106.9 157,119.1 156.2,119.1 155.9,119.4 155.9,125.5 156.196,125.796 157.396,125.796 157.396,129.396
  pour cut-out: 145.1,138.3 145.1,141.7 145.7,142.3 155.9,142.3 156.6,141.6 156.6,138 156,138 156,141.4 155.7,141.7 146,141.7 145.7,141.4 145.7,138.3
  pour cut-out: 139.8,117.2 139.8,125.7 140.2,126.1 143.7,126.1 143.7,130.3 143.7,130.5 143.7,131.8 144.3,132.4 144.3,125.5 140.5,125.5 140.4,125.4 140.4,117.2
  pour cut-out: 125.9,122.1 125.9,129.6 137.1,129.6 137.1,118.4 138.3,117.2 140.4,117.2 140.4,116.6 137,116.6 137,117.9 136.4,118.5 136.4,128.9 126.6,128.9 126.6,122.1
  pour cut-out: 148.5,19 148.5,18 144.1,18 139.8,18 139.8,60.7 135.7,64.8 132.2,64.8 131.4,65.6 131.4,67.2 133.7,69.5 134,69.8 134,89.5 125.8,89.5 125.8,102.2 122.9,102.2 122.9,114.3 124.6,114.3 124.6,113.5 123.7,113.5 123.7,103 126.5,103 126.5,90.2 134.8,90.2 134.8,69.5 132,66.7 132,66.3 132.4,65.9 135.5,65.9 140,61.4 142.4,61.4 142.4,35 140.8,35 140.8,19
  pour cut-out: 147.8,19 163.4,19 163.4,0 147.8,0
  pour cut-out: 143.9,122.1 155.9,122.1 155.9,116.6 157.4,115.1 157.4,112.7 143.9,112.7
  pour cut-out: 160.1,87.4 160.1,87.2 161,87.2 162.2,86 162.2,64.5 159.2,61.5 140.2,61.5 138.7,63 138.7,65.8 138.4,66.1 132.2,66.1 132,66.3 132,66.7 132.2,66.9 138.8,66.9 139.5,66.2 139.5,63.3 140.5,62.3 158.9,62.3 161.4,64.8 161.4,85.6 160.6,86.4 160.1,86.4 160.1,86.2 158.9,86.2 158.9,87.4
Bottom Layer:
  pour cut-out: 146.1,31.8 148.3,31.8 148.3,30.1 146.1,30.1
  pour cut-out: 149.4,12.2 149.4,10.348 149.4,9.9 149.1,9.9 149.1,11.8 145.4,11.8 145.4,12.2
  pour cut-out: 147.142,21.717 147.159,21.7 152,21.7 152,19.4 147.1,19.4 147.1,21.7
  pour cut-out: 161.3,65.2 161.3,64.6 156.6,64.6 156.6,48.9 152.3,48.9 152.3,49.6 155.9,49.6 155.9,65.2
  pour cut-out: 141.3,46.5 141.3,63.9 137.3,63.9 137.3,77.1 133.8,77.1 133.8,91.6 142.3,91.6 142.3,90.4 142.208,90.308 134.8,90.308 134.8,78.3 138.3,78.3 138.3,65 142.4,65 142.4,46.5
  pour cut-out: 163.83,46.5 163.83,31.8 141.3,31.8 141.3,46.5
  pour cut-out: 162.659,36.134 163.766,36.134 163.8,36.1 163.8,8.23 163.83,8.2 152.9,8.2 152.9,30 153.8,30.9 157.424,30.9
GND (plane layer: these items are gaps in the copper):
  rectangle: 22.7,181.4 25.5,184.8
  rectangle: 14.5,181.4 17.3,184.8
  lines w0.254: 98,141.5 89.4,141.5 ; 89.4,141.5 89.4,154 98,154 117.9,154 117.9,171 99.5,171 99.5,165 95.3,165 95.3,175 120.7,175 120.7,148 112.4,148 112.4,141.5 89.4,141.5
  lines w0.7: 163.83,29.5 157.5,29.5 157.5,14 157.5,7.9 148.6,7.9 148.6,36 153.5,36 153.5,44.1 163.5,44.1 163.83,43.77 163.83,43.5
  lines w1: 14.478,57.252 53.34,57.252 53.34,119.609 14.478,119.609 14.478,57.252
  lines w3.5: 64.6,10.1 64.7,10.1 ; 98.9,10.2 99,10.2 ; 109.5,10.2 109.6,10.2 ; 143.8,10.2 143.9,10.2
  lines w4.5: 9,2.7 9.1,2.7 ; 31.6,2.7 31.7,2.7 ; 43.9,8.8 44,8.8 ; 55.3,8.8 55.4,8.8
POWER (plane layer: these items are gaps in the copper):
  rectangle: 22.7,181.4 25.5,184.8
  rectangle: 14.5,181.4 17.3,184.8
  lines w0.254: 13.1,171.5 13.4,171.5
  lines w0.5: 0,39.5 21,39.5 21,25 41.5,25 41.5,38 69.5,38 69.5,46.5 97.7,46.5 ; 13.1,171.5 13.1,50 69.5,50 87.6,50 87.6,57.3 97.7,57.3 97.7,50 ; 13.229,171.5 81.5,171.5 ; 87.5,171.5 87.5,129 135.5,129 135.5,123.5 81.5,123.5 81.5,171.5 ; 97.6,46.5 100.5,46.5 100.5,18.5 107.8,18.5 107.8,50 ; 159.5,131.5 150.5,131.5 144.6,131.5 137.4,138.7 122.5,138.7 110,138.7 110,171.5 81.5,171.5
  lines w0.6: 97.7,50 107.8,50
  lines w0.7: 35.5,0.3 35.5,11 123,11 ; 98,187.708 98,181 129,181 132.5,181 132.5,145.5 159.5,145.5 159.5,109.2 147.5,109.2 ; 122.6,11 139.5,11 139.5,65.9 123,65.9 123,109.2 125.3,109.2 147.5,109.2 ; 163.4,94.5 147.5,94.5 147.5,109.2
  lines w1: 14.478,57.252 53.34,57.252 53.34,119.609 14.478,119.609 14.478,57.252
  lines w3.5: 64.6,10.1 64.7,10.1 ; 98.9,10.2 99,10.2 ; 109.5,10.2 109.6,10.2 ; 143.8,10.2 143.9,10.2
  lines w4.5: 9,2.7 9.1,2.7 ; 31.6,2.7 31.7,2.7 ; 43.9,8.8 44,8.8 ; 55.3,8.8 55.4,8.8

## Silkscreen, mask and mechanical layers (free items; w line width, h text height)
Top Overlay:
  lines w0.2: 125.6,118.6 125.8,118.8 ; 126,118.6 125.8,118.8 ; 144.3,118 145,118 145.8,118.8 ; 144.7,133.8 145.7,134.8 ; 145.4,134.8 145.7,134.8 ; 145.5,118.8 145.8,118.8 ; 145.7,134.5 145.7,134.8 ; 145.8,118.5 145.8,118.8 ; 125,117.7 125,117.7 ; 125,117.7 125.5,117.7 125.8,118 125.8,118.8 ; 125.8,118.8 125.8,118.8
  text "PJ1301-001-A2" at 107.3,176.7 h2

## Text inside footprints (layer, text, board x,y; h text height)
D13: Top Overlay "+" at 143.854,180.661 h0.8
D14: Top Overlay "+" at 139.091,180.661 h0.8
D15: Top Overlay "+" at 134.329,180.661 h0.8
D16: Top Overlay "+" at 129.566,180.661 h0.8
D17: Top Overlay "+" at 115.278,180.661 h0.8
D18: Top Overlay "+" at 110.516,180.661 h0.8
D19: Top Overlay "+" at 148.616,180.661 h0.8
D20: Top Overlay "+" at 120.041,180.661 h0.8
D21: Top Overlay "+" at 124.803,180.661 h0.8
J4: Top Overlay "10" at 130.532,49.216 h0.8 r270; Top Overlay "9" at 127.992,49.216 h0.8 r270; Top Overlay "1" at 127.992,62.932 h0.8 r270; Top Overlay "2" at 130.5,62.9 h0.8 r270
M1: Top Overlay "B2" at 69.8,88.7 h0.8 r90; Top Overlay "B1" at 71.7,88.7 h0.8 r90; Top Overlay "C2" at 69.7,50.2 h0.8 r90; Top Overlay "C1" at 71.7,50.2 h0.8 r90; Top Overlay "A2" at 4.6,134.7 h0.8 r90; Top Overlay "A1" at 2.5,134.7 h0.8 r90